# Altium PCB 多通道.PcbDoc (part 1 of 4)
Units mm, origin at the board's own origin, x right, y up, seen from the top; angles counter-clockwise.
Board outline 145 x 32 mm, 2 copper layers (Top Layer, Bottom Layer); 175 components, 157 nets, 554 pads, 195 vias.
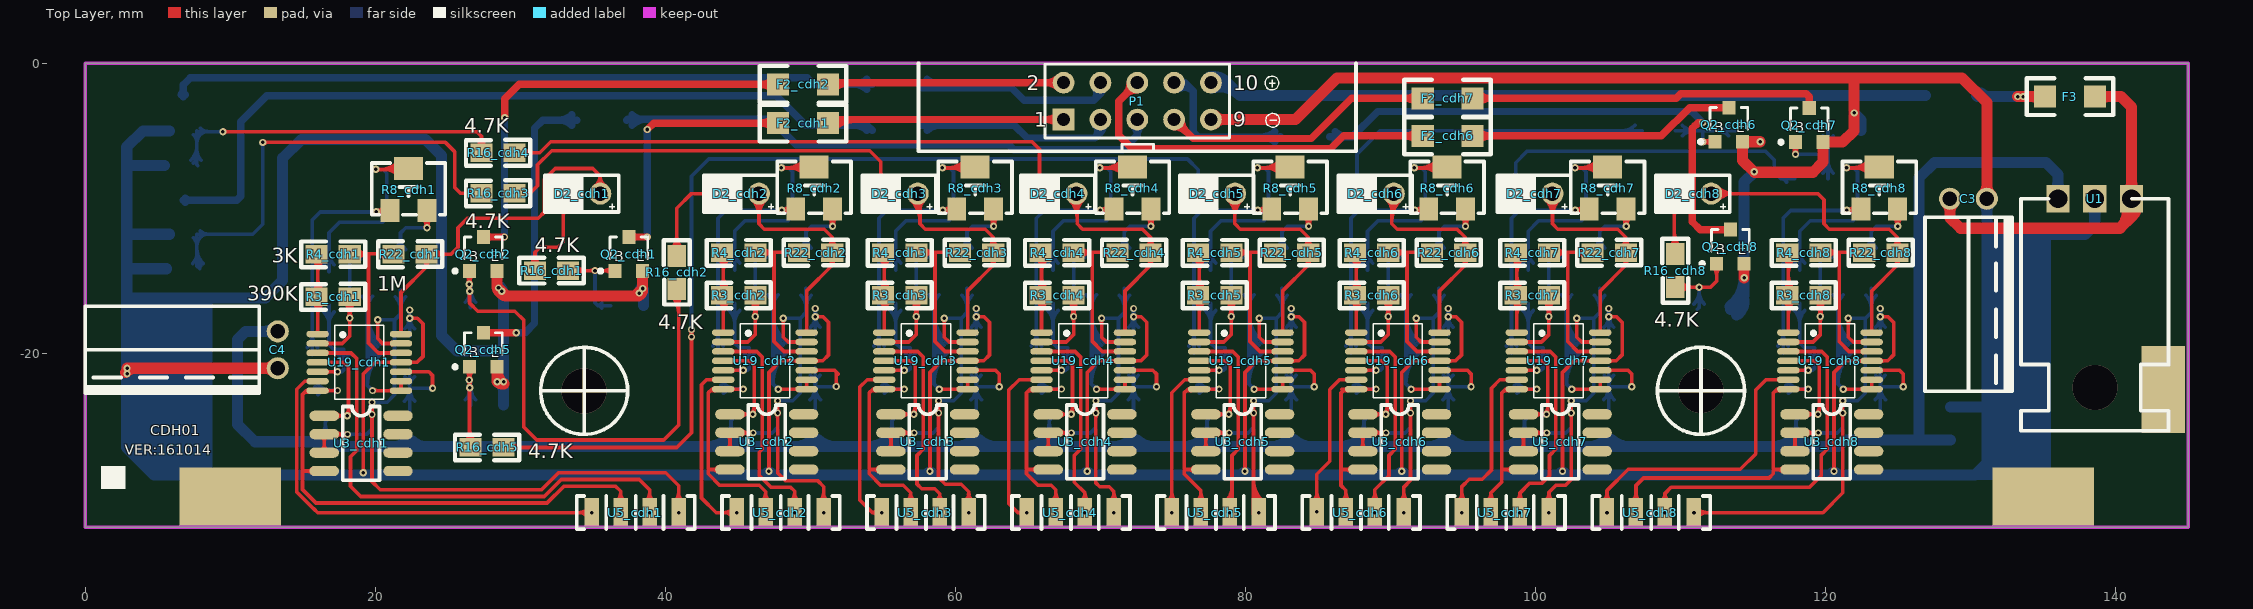
[diagram p0: Top Layer view]
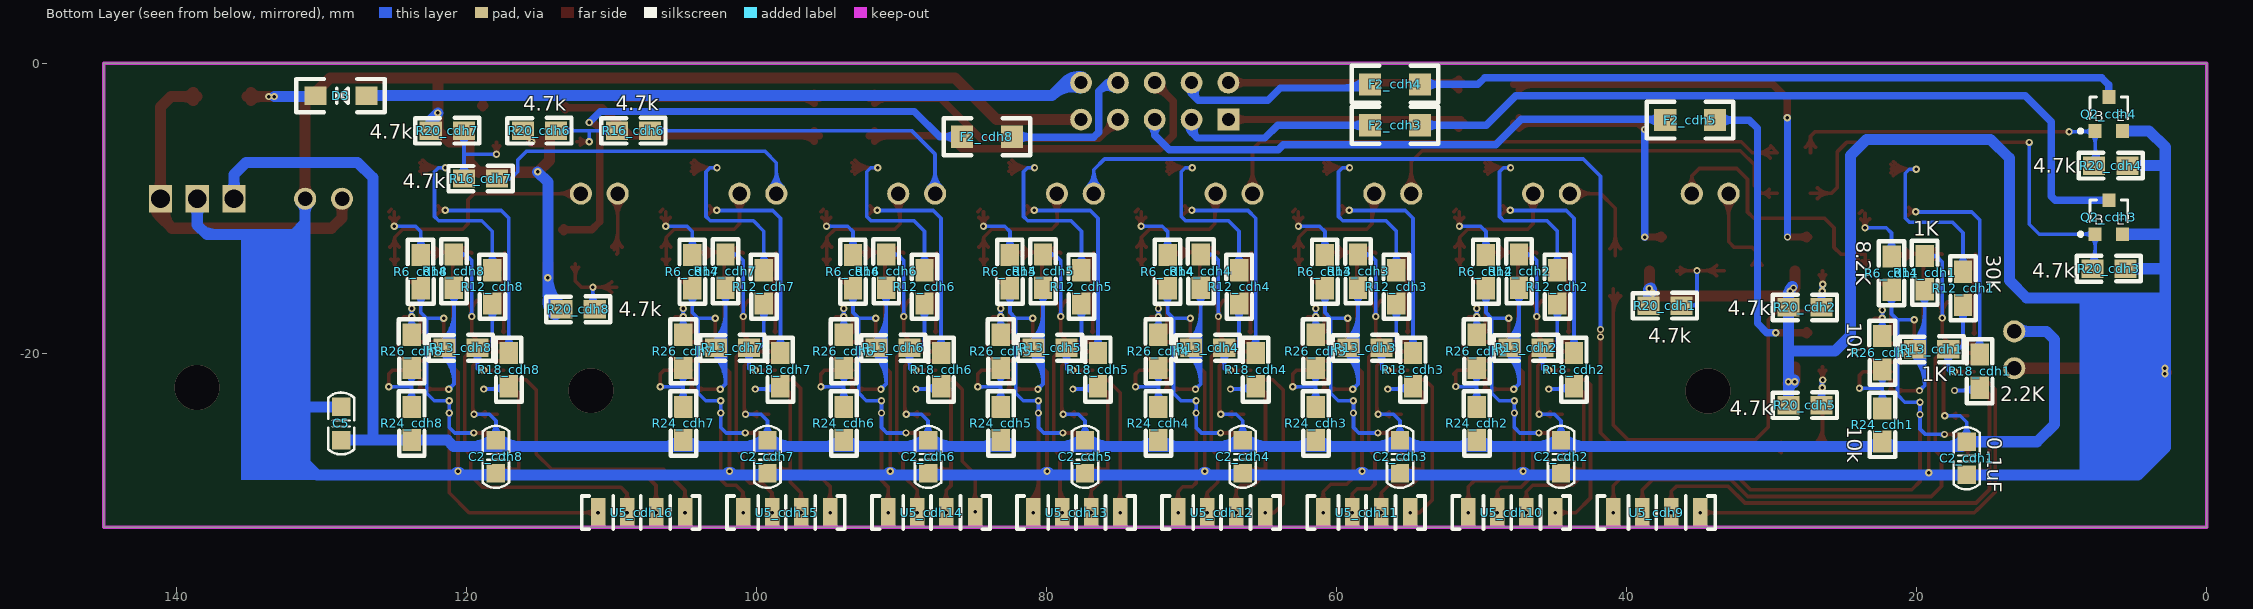
[diagram p1: Bottom Layer view, seen from below]

## Layer stack, top to bottom
Top Layer: signal copper 0.0356
Dielectric: dielectric 0.32, FR-4, Dk 4.8
Bottom Layer: signal copper 0.0356

## Board outline
0,-32 0,0 145,0 145,-32

## Design rules (kind name [scope] priority, off if disabled: settings)
Clearance [All] p1: gap=0.152
HoleSize [All] p1: absolutevalues=TRUE maxlimit=6 minlimit=0.025 maxpercent=80.000 minpercent=20.000
MinimumSolderMaskSliver [All] p1: minsoldermaskwidth=0
PolygonConnect [All] p1: connectstyle=Relief reliefconductorwidth=0.254 reliefentries=4 polygonreliefangle="90 Angle"
RoutingVias [All] p1: holewidth=0.711 width=1.27 viastyle="Through Hole" minholewidth=0.711 minwidth=1.27 maxholewidth=0.711 maxwidth=1.27
SilkToSilkClearance [All] p1: silktosilkclearance=-10
SilkscreenOverComponentPads [All] p1: minsilkscreentomaskgap=-10
SolderMaskExpansion [All] p1: expansion=0.102
Width [All] p1: maxlimit=1.27 minlimit=0.254 preferedwidth=0.254
24 further rules are at their usual default settings.

## Classes and differential pairs
component class 总图: C3 C4 C5 D3 F3 P1 U1
channel class cdh: cdh1 cdh2 cdh3 cdh4 cdh5 cdh6 cdh7 cdh8
net class CDH[1..8]: CDH1 CDH2 CDH3 CDH4 CDH5 CDH6 CDH7 CDH8
component class cdh1: C2_cdh1 D2_cdh1 F2_cdh1 Q2_cdh1 R3_cdh1 R4_cdh1 R6_cdh1 R8_cdh1 R12_cdh1 R13_cdh1 R14_cdh1 R16_cdh1 R18_cdh1 R20_cdh1 R22_cdh1 R24_cdh1 R26_cdh1 U3_cdh1 U5_cdh1 U19_cdh1
component class cdh4: C2_cdh4 D2_cdh4 F2_cdh4 Q2_cdh4 R3_cdh4 R4_cdh4 R6_cdh4 R8_cdh4 R12_cdh4 R13_cdh4 R14_cdh4 R16_cdh4 R18_cdh4 R20_cdh4 R22_cdh4 R24_cdh4 R26_cdh4 U3_cdh4 U5_cdh4 U19_cdh4
component class cdh7: C2_cdh7 D2_cdh7 F2_cdh7 Q2_cdh7 R3_cdh7 R4_cdh7 R6_cdh7 R8_cdh7 R12_cdh7 R13_cdh7 R14_cdh7 R16_cdh7 R18_cdh7 R20_cdh7 R22_cdh7 R24_cdh7 R26_cdh7 U3_cdh7 U5_cdh7 U19_cdh7
component class cdh8: C2_cdh8 D2_cdh8 F2_cdh8 Q2_cdh8 R3_cdh8 R4_cdh8 R6_cdh8 R8_cdh8 R12_cdh8 R13_cdh8 R14_cdh8 R16_cdh8 R18_cdh8 R20_cdh8 R22_cdh8 R24_cdh8 R26_cdh8 U3_cdh8 U5_cdh8 U19_cdh8
component class cdh2: C2_cdh2 D2_cdh2 F2_cdh2 Q2_cdh2 R3_cdh2 R4_cdh2 R6_cdh2 R8_cdh2 R12_cdh2 R13_cdh2 R14_cdh2 R16_cdh2 R18_cdh2 R20_cdh2 R22_cdh2 R24_cdh2 R26_cdh2 U3_cdh2 U5_cdh2 U19_cdh2
component class cdh3: C2_cdh3 D2_cdh3 F2_cdh3 Q2_cdh3 R3_cdh3 R4_cdh3 R6_cdh3 R8_cdh3 R12_cdh3 R13_cdh3 R14_cdh3 R16_cdh3 R18_cdh3 R20_cdh3 R22_cdh3 R24_cdh3 R26_cdh3 U3_cdh3 U5_cdh3 U19_cdh3
component class cdh5: C2_cdh5 D2_cdh5 F2_cdh5 Q2_cdh5 R3_cdh5 R4_cdh5 R6_cdh5 R8_cdh5 R12_cdh5 R13_cdh5 R14_cdh5 R16_cdh5 R18_cdh5 R20_cdh5 R22_cdh5 R24_cdh5 R26_cdh5 U3_cdh5 U5_cdh5 U19_cdh5
component class cdh6: C2_cdh6 D2_cdh6 F2_cdh6 Q2_cdh6 R3_cdh6 R4_cdh6 R6_cdh6 R8_cdh6 R12_cdh6 R13_cdh6 R14_cdh6 R16_cdh6 R18_cdh6 R20_cdh6 R22_cdh6 R24_cdh6 R26_cdh6 U3_cdh6 U5_cdh6 U19_cdh6

## Components (designator, comment, footprint, x,y, rotation, side; value= is the part's Value field where it differs from the comment)
C2_cdh1 "0.1uF" C0805 16.559,-27.244 r90 bottom (schematic designator C2)
C2_cdh2 "Cap Semi" C0805 44.524,-27.142 r90 bottom (schematic designator C2)
C2_cdh3 "Cap Semi" C0805 55.624,-27.142 r90 bottom (schematic designator C2)
C2_cdh4 "Cap Semi" C0805 66.47,-27.142 r90 bottom (schematic designator C2)
C2_cdh5 "Cap Semi" C0805 77.341,-27.142 r90 bottom (schematic designator C2)
C2_cdh6 "Cap Semi" C0805 88.161,-27.142 r90 bottom (schematic designator C2)
C2_cdh7 "Cap Semi" C0805 99.236,-27.142 r90 bottom (schematic designator C2)
C2_cdh8 "Cap Semi" C0805 117.955,-27.142 r90 bottom (schematic designator C2)
C3 "Cap Pol3" CAP-6*12 131.108,-9.347 r180 top
C4 "Cap Pol3" CAP-6*12 13.278,-21.031 r90 top
C5 "Cap Semi" C0805 128.619,-24.841 r270 bottom
D2_cdh1 "LED0" LED1 32.968,-8.992 r0 top (schematic designator D2)
D2_cdh2 "LED0" LED1 43.91,-8.992 r0 top (schematic designator D2)
D2_cdh3 "LED0" LED1 54.853,-8.992 r0 top (schematic designator D2)
D2_cdh4 "LED0" LED1 65.795,-8.992 r0 top (schematic designator D2)
D2_cdh5 "LED0" LED1 76.737,-8.992 r0 top (schematic designator D2)
D2_cdh6 "LED0" LED1 87.679,-8.992 r0 top (schematic designator D2)
D2_cdh7 "LED0" LED1 98.622,-8.992 r0 top (schematic designator D2)
D2_cdh8 "LED0" LED1 109.564,-8.992 r0 top (schematic designator D2)
D3 "1N4007" DIDOE 126.892,-2.235 r0 bottom
F2_cdh1 "Fuse 1" 1206 47.771,-4.115 r0 top (schematic designator F2)
F2_cdh2 "Fuse 1" 1206 47.771,-1.448 r0 top (schematic designator F2)
F2_cdh3 "Fuse 1" 1206 54.248,-4.293 r0 bottom (schematic designator F2)
F2_cdh4 "Fuse 1" 1206 54.248,-1.473 r0 bottom (schematic designator F2)
F2_cdh5 "Fuse 1" 1206 33.903,-3.937 r0 bottom (schematic designator F2)
F2_cdh6 "Fuse 1" 1206 95.65,-5.029 r180 top (schematic designator F2)
F2_cdh7 "Fuse 1" 1206 95.65,-2.438 r180 top (schematic designator F2)
F2_cdh8 "Fuse 1" 1206 85.82,-5.055 r180 bottom (schematic designator F2)
F3 "Fuse 1" 1206 135.122,-2.286 r0 top
P1 "Header 5X2" HDR2X5 67.456,-3.886 r0 top
Q2_cdh1 "NPN" SOT-23 37.484,-13.284 r0 top (schematic designator Q2)
Q2_cdh2 "NPN" SOT-23 27.451,-13.284 r0 top (schematic designator Q2)
Q2_cdh3 "NPN" SOT-23 6.75,-10.744 r180 bottom (schematic designator Q2)
Q2_cdh4 "NPN" SOT-23 6.75,-3.632 r180 bottom (schematic designator Q2)
Q2_cdh5 "NPN" SOT-23 27.451,-19.888 r0 top (schematic designator Q2)
Q2_cdh6 "NPN" SOT-23 113.328,-4.369 r0 top (schematic designator Q2)
Q2_cdh7 "NPN" SOT-23 118.866,-4.394 r0 top (schematic designator Q2)
Q2_cdh8 "NPN" SOT-23 113.43,-12.776 r0 top (schematic designator Q2)
R3_cdh1 "390K" 0805 18.238,-16.104 r180 top (schematic designator R3)
R3_cdh2 "Res2" 0805 46.203,-16.002 r180 top (schematic designator R3)
R3_cdh3 "Res2" 0805 57.303,-16.002 r180 top (schematic designator R3)
R3_cdh4 "Res2" 0805 68.149,-16.002 r180 top (schematic designator R3)
R3_cdh5 "Res2" 0805 79.02,-16.002 r180 top (schematic designator R3)
R3_cdh6 "Res2" 0805 89.84,-16.002 r180 top (schematic designator R3)
R3_cdh7 "Res2" 0805 100.915,-16.002 r180 top (schematic designator R3)
R3_cdh8 "Res2" 0805 119.635,-16.002 r180 top (schematic designator R3)
R4_cdh1 "3K" 0805 15.952,-13.183 r0 top (schematic designator R4)
R4_cdh2 "Res2" 0805 43.917,-13.081 r0 top (schematic designator R4)
R4_cdh3 "Res2" 0805 55.017,-13.081 r0 top (schematic designator R4)
R4_cdh4 "Res2" 0805 65.863,-13.081 r0 top (schematic designator R4)
R4_cdh5 "Res2" 0805 76.734,-13.081 r0 top (schematic designator R4)
R4_cdh6 "Res2" 0805 87.554,-13.081 r0 top (schematic designator R4)
R4_cdh7 "Res2" 0805 98.629,-13.081 r0 top (schematic designator R4)
R4_cdh8 "Res2" 0805 117.349,-13.081 r0 top (schematic designator R4)
R6_cdh1 "8.2K" 0805 21.736,-15.621 r90 bottom (schematic designator R6)
R6_cdh2 "Res2" 0805 49.701,-15.519 r90 bottom (schematic designator R6)
R6_cdh3 "Res2" 0805 60.801,-15.519 r90 bottom (schematic designator R6)
R6_cdh4 "Res2" 0805 71.647,-15.519 r90 bottom (schematic designator R6)
R6_cdh5 "Res2" 0805 82.518,-15.519 r90 bottom (schematic designator R6)
R6_cdh6 "Res2" 0805 93.339,-15.519 r90 bottom (schematic designator R6)
R6_cdh7 "Res2" 0805 104.413,-15.519 r90 bottom (schematic designator R6)
R6_cdh8 "Res2" 0805 123.133,-15.519 r90 bottom (schematic designator R6)
R8_cdh1 "Res Tap" 3224W 22.295,-7.264 r0 top (schematic designator R8)
R8_cdh2 "Res Tap" 3224W 50.26,-7.163 r0 top (schematic designator R8)
R8_cdh3 "Res Tap" 3224W 61.36,-7.163 r0 top (schematic designator R8)
R8_cdh4 "Res Tap" 3224W 72.206,-7.163 r0 top (schematic designator R8)
R8_cdh5 "Res Tap" 3224W 83.077,-7.163 r0 top (schematic designator R8)
R8_cdh6 "Res Tap" 3224W 93.897,-7.163 r0 top (schematic designator R8)
R8_cdh7 "Res Tap" 3224W 104.972,-7.163 r0 top (schematic designator R8)
R8_cdh8 "Res Tap" 3224W 123.692,-7.163 r0 top (schematic designator R8)
R12_cdh1 "30K" 0805 16.808,-14.376 r270 bottom (schematic designator R12)
R12_cdh2 "Res2" 0805 44.774,-14.275 r270 bottom (schematic designator R12)
R12_cdh3 "Res2" 0805 55.874,-14.275 r270 bottom (schematic designator R12)
R12_cdh4 "Res2" 0805 66.719,-14.275 r270 bottom (schematic designator R12)
R12_cdh5 "Res2" 0805 77.591,-14.275 r270 bottom (schematic designator R12)
R12_cdh6 "Res2" 0805 88.411,-14.275 r270 bottom (schematic designator R12)
R12_cdh7 "Res2" 0805 99.485,-14.275 r270 bottom (schematic designator R12)
R12_cdh8 "Res2" 0805 118.205,-14.275 r270 bottom (schematic designator R12)
R13_cdh1 "1K" 0805 17.829,-19.725 r0 bottom (schematic designator R13)
R13_cdh2 "Res2" 0805 45.794,-19.624 r0 bottom (schematic designator R13)
R13_cdh3 "Res2" 0805 56.894,-19.624 r0 bottom (schematic designator R13)
R13_cdh4 "Res2" 0805 67.74,-19.624 r0 bottom (schematic designator R13)
R13_cdh5 "Res2" 0805 78.611,-19.624 r0 bottom (schematic designator R13)
R13_cdh6 "Res2" 0805 89.431,-19.624 r0 bottom (schematic designator R13)
R13_cdh7 "Res2" 0805 100.506,-19.624 r0 bottom (schematic designator R13)
R13_cdh8 "Res2" 0805 119.225,-19.624 r0 bottom (schematic designator R13)
R14_cdh1 "1K" 0805 19.454,-13.299 r270 bottom (schematic designator R14)
R14_cdh2 "Res2" 0805 47.42,-13.198 r270 bottom (schematic designator R14)
R14_cdh3 "Res2" 0805 58.519,-13.198 r270 bottom (schematic designator R14)
R14_cdh4 "Res2" 0805 69.365,-13.198 r270 bottom (schematic designator R14)
R14_cdh5 "Res2" 0805 80.236,-13.198 r270 bottom (schematic designator R14)
R14_cdh6 "Res2" 0805 91.057,-13.198 r270 bottom (schematic designator R14)
R14_cdh7 "Res2" 0805 102.131,-13.198 r270 bottom (schematic designator R14)
R14_cdh8 "Res2" 0805 120.851,-13.198 r270 bottom (schematic designator R14)
R16_cdh1 "4.7K" 0805 31.007,-14.3 r0 top (schematic designator R16)
R16_cdh2 "4.7K" 0805 40.786,-13.284 r270 top (schematic designator R16)
R16_cdh3 "4.7K" 0805 29.61,-8.966 r180 top (schematic designator R16)
R16_cdh4 "4.7K" 0805 29.61,-6.172 r180 top (schematic designator R16)
R16_cdh5 "4.7K" 0805 28.848,-26.492 r180 top (schematic designator R16)
R16_cdh6 "4.7k" 0805 107.334,-4.648 r0 bottom (schematic designator R16)
R16_cdh7 "4.7k" 0805 117.875,-7.95 r0 bottom (schematic designator R16)
R16_cdh8 "4.7K" 0805 109.62,-13.157 r270 top (schematic designator R16)
R18_cdh1 "2.2K" 0805 15.665,-22.377 r90 bottom (schematic designator R18)
R18_cdh2 "Res2" 0805 43.631,-22.276 r90 bottom (schematic designator R18)
R18_cdh3 "Res2" 0805 54.731,-22.276 r90 bottom (schematic designator R18)
R18_cdh4 "Res2" 0805 65.576,-22.276 r90 bottom (schematic designator R18)
R18_cdh5 "Res2" 0805 76.448,-22.276 r90 bottom (schematic designator R18)
R18_cdh6 "Res2" 0805 87.268,-22.276 r90 bottom (schematic designator R18)
R18_cdh7 "Res2" 0805 98.342,-22.276 r90 bottom (schematic designator R18)
R18_cdh8 "Res2" 0805 117.062,-22.276 r90 bottom (schematic designator R18)
R20_cdh1 "4.7k" 0805 36.214,-16.713 r0 bottom (schematic designator R20)
R20_cdh2 "4.7k" 0805 26.562,-16.84 r0 bottom (schematic designator R20)
R20_cdh3 "4.7k" 0805 7.893,-14.173 r180 bottom (schematic designator R20)
R20_cdh4 "4.7k" 0805 7.766,-7.061 r180 bottom (schematic designator R20)
R20_cdh5 "4.7k" 0805 26.562,-23.571 r0 bottom (schematic designator R20)
R20_cdh6 "4.7k" 0805 113.811,-4.648 r0 bottom (schematic designator R20)
R20_cdh7 "4.7k" 0805 120.161,-4.648 r0 bottom (schematic designator R20)
R20_cdh8 "4.7k" 0805 111.144,-16.967 r0 bottom (schematic designator R20)
R22_cdh1 "1M" 0805 21.258,-13.172 r0 top (schematic designator R22)
R22_cdh2 "Res2" 0805 49.223,-13.071 r0 top (schematic designator R22)
R22_cdh3 "Res2" 0805 60.323,-13.071 r0 top (schematic designator R22)
R22_cdh4 "Res2" 0805 71.169,-13.071 r0 top (schematic designator R22)
R22_cdh5 "Res2" 0805 82.04,-13.071 r0 top (schematic designator R22)
R22_cdh6 "Res2" 0805 92.86,-13.071 r0 top (schematic designator R22)
R22_cdh7 "Res2" 0805 103.935,-13.071 r0 top (schematic designator R22)
R22_cdh8 "Res2" 0805 122.654,-13.071 r0 top (schematic designator R22)
R24_cdh1 "10k" 0805 22.371,-23.8 r270 bottom (schematic designator R24)
R24_cdh2 "Res2" 0805 50.336,-23.698 r270 bottom (schematic designator R24)
R24_cdh3 "Res2" 0805 61.436,-23.698 r270 bottom (schematic designator R24)
R24_cdh4 "Res2" 0805 72.282,-23.698 r270 bottom (schematic designator R24)
R24_cdh5 "Res2" 0805 83.153,-23.698 r270 bottom (schematic designator R24)
R24_cdh6 "Res2" 0805 93.974,-23.698 r270 bottom (schematic designator R24)
R24_cdh7 "Res2" 0805 105.048,-23.698 r270 bottom (schematic designator R24)
R24_cdh8 "Res2" 0805 123.768,-23.698 r270 bottom (schematic designator R24)
R26_cdh1 "10k" 0805 22.371,-18.821 r270 bottom (schematic designator R26)
R26_cdh2 "Res2" 0805 50.336,-18.72 r270 bottom (schematic designator R26)
R26_cdh3 "Res2" 0805 61.436,-18.72 r270 bottom (schematic designator R26)
R26_cdh4 "Res2" 0805 72.282,-18.72 r270 bottom (schematic designator R26)
R26_cdh5 "Res2" 0805 83.153,-18.72 r270 bottom (schematic designator R26)
R26_cdh6 "Res2" 0805 93.974,-18.72 r270 bottom (schematic designator R26)
R26_cdh7 "Res2" 0805 105.048,-18.72 r270 bottom (schematic designator R26)
R26_cdh8 "Res2" 0805 123.768,-18.72 r270 bottom (schematic designator R26)
U1 "L7808" TO-220 141.091,-9.347 r180 top
U3_cdh1 "LM317" SO-8 16.485,-24.308 r0 top (schematic designator U3)
U3_cdh2 "LM317" SO-8 44.451,-24.206 r0 top (schematic designator U3)
U3_cdh3 "LM317" SO-8 55.55,-24.206 r0 top (schematic designator U3)
U3_cdh4 "LM317" SO-8 66.396,-24.206 r0 top (schematic designator U3)
U3_cdh5 "LM317" SO-8 77.267,-24.206 r0 top (schematic designator U3)
U3_cdh6 "LM317" SO-8 88.088,-24.206 r0 top (schematic designator U3)
U3_cdh7 "LM317" SO-8 99.162,-24.206 r0 top (schematic designator U3)
U3_cdh8 "LM317" SO-8 117.882,-24.206 r0 top (schematic designator U3)
U5_cdh1 "Header 4" PIN4 34.917,-30.988 r0 top (schematic designator U5)
U5_cdh2 "Header 4" PIN4 44.917,-30.988 r0 top (schematic designator U5)
U5_cdh3 "Header 4" PIN4 54.917,-30.988 r0 top (schematic designator U5)
U5_cdh4 "Header 4" PIN4 64.917,-30.988 r0 top (schematic designator U5)
U5_cdh5 "Header 4" PIN4 74.917,-30.988 r0 top (schematic designator U5)
U5_cdh6 "Header 4" PIN4 84.917,-30.988 r0 top (schematic designator U5)
U5_cdh7 "Header 4" PIN4 94.917,-30.988 r0 top (schematic designator U5)
U5_cdh8 "Header 4" PIN4 104.917,-30.988 r0 top (schematic designator U5)
U5_cdh9 "Header 4" PIN4 34.917,-30.988 r0 bottom (schematic designator U5)
U5_cdh10 "Header 4" PIN4 44.917,-30.988 r0 bottom (schematic designator U5)
U5_cdh11 "Header 4" PIN4 54.917,-30.988 r0 bottom (schematic designator U5)
U5_cdh12 "Header 4" PIN4 64.917,-30.988 r0 bottom (schematic designator U5)
U5_cdh13 "Header 4" PIN4 74.917,-30.988 r0 bottom (schematic designator U5)
U5_cdh14 "Header 4" PIN4 84.912,-30.988 r0 bottom (schematic designator U5)
U5_cdh15 "Header 4" PIN4 94.917,-30.988 r0 bottom (schematic designator U5)
U5_cdh16 "Header 4" PIN4 104.917,-30.988 r0 bottom (schematic designator U5)
U19_cdh1 "TLC2264" TSSOP14 18.898,-20.625 r0 top (schematic designator U19)
U19_cdh2 "TLC2264" TSSOP14 46.864,-20.523 r0 top (schematic designator U19)
U19_cdh3 "TLC2264" TSSOP14 57.963,-20.523 r0 top (schematic designator U19)
U19_cdh4 "TLC2264" TSSOP14 68.809,-20.523 r0 top (schematic designator U19)
U19_cdh5 "TLC2264" TSSOP14 79.68,-20.523 r0 top (schematic designator U19)
U19_cdh6 "TLC2264" TSSOP14 90.501,-20.523 r0 top (schematic designator U19)
U19_cdh7 "TLC2264" TSSOP14 101.575,-20.523 r0 top (schematic designator U19)
U19_cdh8 "TLC2264" TSSOP14 120.295,-20.523 r0 top (schematic designator U19)

## Footprints (in the part's own frame and the unit in brackets; to place one, negate y for a bottom-side part, rotate by r counter-clockwise, add the part's x,y. Pads: shape width x height; smd on the part's side, far side on the other; paste and mask are expansions set on the pad)
0805 [mil]
  rect 60x50 smd: 1(0,0) 2(90,0)
  silkscreen extent -42,-35 132,35
1206 [mil]
  rect 60x60 smd: 1(0.22,-0.6) 2(135.22,-0.6)
  silkscreen extent -50,-51 185,49
3224W [mm] "SOT23, 3-Leads, Body 3.0x2.6mm (max), Pitch 0.95mm, IPC Medium Den"
  rect 1.3x1.6 smd: 1(1.27,-2.9) 2(-1.27,-2.9)
  rect 2x1.6 smd: 3(0,0)
  silkscreen extent -2.54,-3.17 2.54,0.38
C0805 [mil]
  rect 50x50 smd: 1(-45,0) 2(45,0)
  silkscreen extent -84,-36 84,36, body extent -39,-25 40,24, height 20
CAP-6*12 [mil]
  round 60 hole 39.37: 1(100,0) 2(0,0)
  silkscreen extent -68,50 168,522
DIDOE [mil]
  rect 60x50 smd: 1(0,0) 2(137.8,0)
  silkscreen extent -50,-45 190,45
HDR2X5 [mm] "Connector; Header; 5x2 Posi"
  rect 1.5x1.5 hole 0.9: 1(0,0)
  round 1.5 hole 0.9: 2(0,2.54) 3(2.54,0) 4(2.54,2.54) 5(5.08,0) 6(5.08,2.54) 7(7.62,0) 8(7.62,2.54) 9(10.16,0) 10(10.16,2.54)
  silkscreen extent -1.27,-1.27 11.43,3.81
LED1 [mil]
  round 60 hole 39.37: 1(100,0) 2(0,0)
  silkscreen extent -50,-50 150,50
PIN4 [mm]
  rect 1x2 smd: 1(0,0) 2(2,0) 3(4,0) 4(6,0)
  silkscreen extent -1.02,-1.14 7.11,1.14
SO-8 [mil]
  oval 80x28 smd: 1(0,0) 2(0,-50) 3(0,-100) 4(0,-150) 5(200,-150) 6(200,-100) 7(200,-50) 8(200,0)
  silkscreen extent 50,-175 150,25
SOT-23 [mm]
  rect 0.9x0.95 smd: 1(0,1.302) 2(-0.95,-1.048) 3(0.95,-1.048)
  silkscreen extent -2.07,-1.17 1.3,1.3
TO-220 [mm]
  rect 1.6x1.9 hole 1.3: 1(0,0) 2(2.54,0) 3(5.08,0)
  silkscreen extent -2.54,0 7.62,16
TSSOP14 [mm]
  oval 1.55x0.45 smd: 1(-2.875,1.95) 2(-2.875,1.3) 3(-2.875,0.65) 4(-2.875,0) 5(-2.875,-0.65) 6(-2.875,-1.3) 7(-2.875,-1.95) 8(2.875,-1.95) 9(2.875,-1.3) 10(2.875,-0.65) 11(2.875,0) 12(2.875,0.65) 13(2.875,1.3) 14(2.875,1.95)
  silkscreen extent -1.7,-2.55 1.7,2.55, body extent -2.25,-2.55 2.25,2.55, height 2.65

## Part data
C2_cdh1: library part "Cap Semi", "Capacitor (Semiconductor SIM Mo"
C2_cdh2 C2_cdh3 C2_cdh4 C2_cdh5 C2_cdh6 C2_cdh7 C2_cdh8 C5: "Capacitor (Semiconductor SIM Mo"
C3 C4: "Polarized Capacitor (Surface Mo"
D2_cdh1 D2_cdh2 D2_cdh3 D2_cdh4 D2_cdh5 D2_cdh6 D2_cdh7 D2_cdh8: "Typical INFRARED GaA"
D3: library part "Diode 1N4007", "1 Amp General Purpose Recti"
P1: "Header, 5-Pin, Dual row"
Q2_cdh1 Q2_cdh2 Q2_cdh3 Q2_cdh4 Q2_cdh5 Q2_cdh6 Q2_cdh7 Q2_cdh8: "NPN Bipolar Transi"
R3_cdh1 R4_cdh1 R6_cdh1 R12_cdh1 R13_cdh1 R14_cdh1 R16_cdh1 R16_cdh2 R16_cdh3 R16_cdh4 R16_cdh5 R16_cdh6 R16_cdh7 R16_cdh8 R18_cdh1 R20_cdh1 R20_cdh2 R20_cdh3 R20_cdh4 R20_cdh5 R20_cdh6 R20_cdh7 R20_cdh8 R22_cdh1 R24_cdh1 R26_cdh1: library part Res2, "Resi"
R3_cdh2 R3_cdh3 R3_cdh4 R3_cdh5 R3_cdh6 R3_cdh7 R3_cdh8 R4_cdh2 R4_cdh3 R4_cdh4 R4_cdh5 R4_cdh6 R4_cdh7 R4_cdh8 R6_cdh2 R6_cdh3 R6_cdh4 R6_cdh5 R6_cdh6 R6_cdh7 R6_cdh8 R12_cdh2 R12_cdh3 R12_cdh4 R12_cdh5 R12_cdh6 R12_cdh7 R12_cdh8 R13_cdh2 R13_cdh3 R13_cdh4 R13_cdh5 R13_cdh6 R13_cdh7 R13_cdh8 R14_cdh2 R14_cdh3 R14_cdh4 R14_cdh5 R14_cdh6 R14_cdh7 R14_cdh8 R18_cdh2 R18_cdh3 R18_cdh4 R18_cdh5 R18_cdh6 R18_cdh7 R18_cdh8 R22_cdh2 R22_cdh3 R22_cdh4 R22_cdh5 R22_cdh6 R22_cdh7 R22_cdh8 R24_cdh2 R24_cdh3 R24_cdh4 R24_cdh5 R24_cdh6 R24_cdh7 R24_cdh8 R26_cdh2 R26_cdh3 R26_cdh4 R26_cdh5 R26_cdh6 R26_cdh7 R26_cdh8: "Resi"
R8_cdh1 R8_cdh2 R8_cdh3 R8_cdh4 R8_cdh5 R8_cdh6 R8_cdh7 R8_cdh8: "Tapped Resistor"
U5_cdh1 U5_cdh2 U5_cdh3 U5_cdh4 U5_cdh5 U5_cdh6 U5_cdh7 U5_cdh8 U5_cdh9 U5_cdh10 U5_cdh11 U5_cdh12 U5_cdh13 U5_cdh14 U5_cdh15 U5_cdh16: "Header, 4"
U19_cdh1 U19_cdh2 U19_cdh3 U19_cdh4 U19_cdh5 U19_cdh6 U19_cdh7 U19_cdh8: library part TLC

## Free pads (board coordinates)
  rect 7x4 smd: 0(10,-29.87) 0(135,-29.87)
  rect 3x6 smd: 1(143.275,-22.504)

## Via types
v1: diameter 0.5, hole 0.25, Top Layer to Bottom Layer, 192 vias
v2: diameter 3.1, hole 3.1, Top Layer to Bottom Layer, 3 vias

## Nets (pads, with @x,y where several pads share a name; then routed paths per layer and width w, separated by ;. In a path a pad name is that pad's centre, name@x,y a point inside that pad or via, vN(x,y) a via of type N, cw(c..) or ccw(c..) an arc to the next point about the centre after c; other vN are vias at no path point)
CDH1: 
CDH2: 
CDH3: 
CDH4: 
CDH5: 
CDH6: 
CDH7: 
CDH8: 
GND: C2_cdh1.1 C2_cdh2.1 C2_cdh3.1 C2_cdh4.1 C2_cdh5.1 C2_cdh6.1 C2_cdh7.1 C2_cdh8.1 C3.2 C4.2 C5.1 P1.9 Q2_cdh1.3 Q2_cdh2.3 Q2_cdh3.3 Q2_cdh4.3 Q2_cdh5.3 Q2_cdh6.3 Q2_cdh7.3 Q2_cdh8.3 R20_cdh1.2 R20_cdh2.2 R20_cdh3.2 R20_cdh4.2 R20_cdh5.2 R20_cdh6.2 R20_cdh7.2 R20_cdh8.2 R26_cdh1.1 R26_cdh2.1 R26_cdh3.1 R26_cdh4.1 R26_cdh5.1 R26_cdh6.1 R26_cdh7.1 R26_cdh8.1 U1.2 U19_cdh1.11 U19_cdh2.11 U19_cdh3.11 U19_cdh4.11 U19_cdh5.11 U19_cdh6.11 U19_cdh7.11 U19_cdh8.11 | length 583.4
  Top Layer w0.254: v1@19.088,-28.147 ccw(c18.878,-27.937) 19.175,-27.937 ccw(c19.472,-27.937) v1@19.262,-28.147 ; v1(19.175,-28.234) 19.175,-21.427 19.977,-20.625 U19_cdh1.11@21.773,-20.625 22.879,-20.625 23.285,-20.218 23.285,-17.958 22.904,-17.577 v1(22.371,-17.577) ; U19_cdh1.11@21.154,-20.694 ccw(c20.987,-20.861) 20.987,-20.625 ccw(c20.987,-20.388) U19_cdh1.11@21.154,-20.556 ; U19_cdh1.11@22.392,-20.694 cw(c22.56,-20.861) 22.56,-20.625 cw(c22.56,-20.388) U19_cdh1.11@22.392,-20.556 ; v1@22.458,-17.664 cw(c22.668,-17.874) 22.668,-17.577 cw(c22.668,-17.28) v1@22.458,-17.49 ; v1@47.053,-28.046 ccw(c46.843,-27.836) 47.14,-27.836 ccw(c47.437,-27.836) v1@47.227,-28.046 ; v1(47.14,-28.133) 47.14,-21.326 47.943,-20.523 U19_cdh2.11@49.739,-20.523 50.844,-20.523 51.251,-20.117 51.251,-17.856 50.87,-17.475 v1(50.336,-17.475) ; U19_cdh2.11@49.119,-20.592 ccw(c48.952,-20.76) 48.952,-20.523 ccw(c48.952,-20.287) U19_cdh2.11@49.119,-20.454 ; U19_cdh2.11@50.358,-20.592 cw(c50.525,-20.76) 50.525,-20.523 cw(c50.525,-20.287) U19_cdh2.11@50.358,-20.454 ; v1@50.423,-17.562 cw(c50.633,-17.772) 50.633,-17.475 cw(c50.633,-17.178) v1@50.423,-17.388 ; v1@58.153,-28.046 ccw(c57.943,-27.836) 58.24,-27.836 ccw(c58.537,-27.836) v1@58.327,-28.046 ; v1(58.24,-28.133) 58.24,-21.326 59.042,-20.523 U19_cdh3.11@60.838,-20.523 61.944,-20.523 62.351,-20.117 62.351,-17.856 61.97,-17.475 v1(61.436,-17.475) ; U19_cdh3.11@60.219,-20.592 ccw(c60.052,-20.76) 60.052,-20.523 ccw(c60.052,-20.287) U19_cdh3.11@60.219,-20.454 ; U19_cdh3.11@61.458,-20.592 cw(c61.625,-20.76) 61.625,-20.523 cw(c61.625,-20.287) U19_cdh3.11@61.458,-20.454 ; v1@61.523,-17.562 cw(c61.733,-17.772) 61.733,-17.475 cw(c61.733,-17.178) v1@61.523,-17.388 ; v1@68.999,-28.046 ccw(c68.789,-27.836) 69.086,-27.836 ccw(c69.383,-27.836) v1@69.173,-28.046 ; v1(69.086,-28.133) 69.086,-21.326 69.888,-20.523 U19_cdh4.11@71.684,-20.523 72.79,-20.523 73.196,-20.117 73.196,-17.856 72.815,-17.475 v1(72.282,-17.475) ; U19_cdh4.11@71.065,-20.592 ccw(c70.898,-20.76) 70.898,-20.523 ccw(c70.898,-20.287) U19_cdh4.11@71.065,-20.454 ; U19_cdh4.11@72.303,-20.592 cw(c72.471,-20.76) 72.471,-20.523 cw(c72.471,-20.287) U19_cdh4.11@72.303,-20.454 ; v1@72.369,-17.562 cw(c72.579,-17.772) 72.579,-17.475 cw(c72.579,-17.178) v1@72.369,-17.388 ; v1@79.87,-28.046 ccw(c79.66,-27.836) 79.957,-27.836 ccw(c80.254,-27.836) v1@80.044,-28.046 ; v1(79.957,-28.133) 79.957,-21.326 80.759,-20.523 U19_cdh5.11@82.555,-20.523 83.661,-20.523 84.068,-20.117 84.068,-17.856 83.687,-17.475 v1(83.153,-17.475) ; U19_cdh5.11@81.936,-20.592 ccw(c81.769,-20.76) 81.769,-20.523 ccw(c81.769,-20.287) U19_cdh5.11@81.936,-20.454 ; U19_cdh5.11@83.175,-20.592 cw(c83.342,-20.76) 83.342,-20.523 cw(c83.342,-20.287) U19_cdh5.11@83.175,-20.454 ; v1@83.24,-17.562 cw(c83.45,-17.772) 83.45,-17.475 cw(c83.45,-17.178) v1@83.24,-17.388 ; v1@90.69,-28.046 ccw(c90.48,-27.836) 90.777,-27.836 ccw(c91.074,-27.836) v1@90.864,-28.046 ; v1(90.777,-28.133) 90.777,-21.326 91.58,-20.523 U19_cdh6.11@93.376,-20.523 94.482,-20.523 94.888,-20.117 94.888,-17.856 94.507,-17.475 v1(93.974,-17.475) ; U19_cdh6.11@92.757,-20.592 ccw(c92.589,-20.76) 92.589,-20.523 ccw(c92.589,-20.287) U19_cdh6.11@92.757,-20.454 ; U19_cdh6.11@93.995,-20.592 cw(c94.162,-20.76) 94.162,-20.523 cw(c94.162,-20.287) U19_cdh6.11@93.995,-20.454 ; v1@94.061,-17.562 cw(c94.271,-17.772) 94.271,-17.475 cw(c94.271,-17.178) v1@94.061,-17.388 ; v1@101.765,-28.046 ccw(c101.555,-27.836) 101.852,-27.836 ccw(c102.149,-27.836) v1@101.939,-28.046 ; v1(101.852,-28.133) 101.852,-21.326 102.654,-20.523 U19_cdh7.11@104.45,-20.523 105.556,-20.523 105.962,-20.117 105.962,-17.856 105.581,-17.475 v1(105.048,-17.475) ; U19_cdh7.11@103.831,-20.592 ccw(c103.664,-20.76) 103.664,-20.523 ccw(c103.664,-20.287) U19_cdh7.11@103.831,-20.454 ; U19_cdh7.11@105.069,-20.592 cw(c105.237,-20.76) 105.237,-20.523 cw(c105.237,-20.287) U19_cdh7.11@105.069,-20.454 ; v1@105.135,-17.562 cw(c105.345,-17.772) 105.345,-17.475 cw(c105.345,-17.178) v1@105.135,-17.388 ; v1@120.485,-28.046 ccw(c120.275,-27.836) 120.572,-27.836 ccw(c120.869,-27.836) v1@120.659,-28.046 ; v1(120.572,-28.133) 120.572,-21.326 121.374,-20.523 U19_cdh8.11@123.17,-20.523 124.276,-20.523 124.682,-20.117 124.682,-17.856 124.301,-17.475 v1(123.768,-17.475) ; U19_cdh8.11@122.551,-20.592 ccw(c122.383,-20.76) 122.383,-20.523 ccw(c122.383,-20.287) U19_cdh8.11@122.551,-20.454 ; U19_cdh8.11@123.789,-20.592 cw(c123.957,-20.76) 123.957,-20.523 cw(c123.957,-20.287) U19_cdh8.11@123.789,-20.454 ; v1@123.855,-17.562 cw(c124.065,-17.772) 124.065,-17.475 cw(c124.065,-17.178) v1@123.855,-17.388
  Top Layer w0.762: v1@2.797,-21.32 cw(c3.493,-22.016) 3.493,-21.031 ; v1(2.889,-21.031) C4.2@13.278,-21.031 ; C4.2@13.008,-21.301 ccw(c12.358,-21.951) 12.358,-21.031 ccw(c12.358,-20.111) C4.2@13.008,-20.762 ; Q2_cdh5.3@28.401,-21.208 ccw(c29.611,-21.208) v1@28.755,-22.064 ; Q2_cdh5.3@28.401,-20.936 v1(28.401,-21.956) ; 28.401,-15.259 ccw(c29.195,-15.259) 28.633,-15.82 ccw(c29.195,-15.259) 29.195,-16.053 ; Q2_cdh2.3@28.401,-14.332 v1@28.401,-15.403 ; v1@28.417,-21.826 cw(c28.367,-22.234) v1@28.691,-21.981 ; v1@28.515,-22.02 ccw(c28.199,-21.841) 28.549,-21.744 ; v1@28.611,-15.79 ccw(c29.051,-15.553) 29.051,-16.053 ; v1@28.664,-15.843 cw(c28.901,-15.403) v1@28.401,-15.403 ; v1@28.873,-22.1 cw(c28.772,-21.585) v1(28.401,-21.956) ; v1@28.881,-22.098 cw(c28.76,-21.628) 28.416,-21.971 v1(28.401,-21.956) ; Q2_cdh1.3@38.434,-14.332 v1(38.434,-15.535) 37.916,-16.053 29.051,-16.053 ; P1.9@77.616,-3.886 83.433,-3.886 86.303,-1.016 121.939,-1.016 ; P1.9@77.877,-4.147 cw(c78.507,-4.777) 78.507,-3.886 cw(c78.507,-2.995) P1.9@77.877,-3.625 ; v1(114.38,-14.798) Q2_cdh8.3@114.38,-13.824 ; v1(115.481,-5.417) Q2_cdh6.3@114.278,-5.417 114.278,-6.716 115.081,-7.518 119.12,-7.518 119.816,-6.822 Q2_cdh7.3@119.816,-5.442 121.17,-5.442 121.939,-4.674 121.939,-1.016 ; C3.2@130.839,-9.078 ccw(c130.189,-8.427) 131.108,-8.427 ccw(c132.028,-8.427) C3.2@131.378,-9.078 ; C3.2@131.108,-9.347 131.108,-2.718 129.407,-1.016 121.939,-1.016 ; v1@28.401,-15.403 v1(28.492,-15.494) v1(28.726,-15.728) 29.051,-16.053 ; v1@38.288,-15.942 cw(c38.021,-15.675) 38.021,-16.053 ccw(c38.021,-15.675) v1@38.288,-15.942 ; v1@38.288,-15.942 ccw(c37.935,-15.589) 38.434,-15.589 cw(c37.935,-15.589) v1@38.288,-15.942
  Bottom Layer w0.254: R26_cdh1.1@22.037,-18.312 ccw(c21.396,-17.577) v1(22.371,-17.577) ; v1@22.264,-17.638 cw(c22.007,-17.787) 22.294,-17.864 cw(c22.581,-17.94) v1@22.432,-17.683 ; v1@22.284,-17.664 cw(c22.074,-17.874) 22.371,-17.874 cw(c22.668,-17.874) v1@22.458,-17.664 ; v1@22.284,-17.49 ccw(c22.074,-17.28) 22.371,-17.28 ccw(c22.668,-17.28) v1@22.458,-17.49 ; v1@22.284,-17.105 cw(c22.074,-17.315) 22.371,-17.315 cw(c22.668,-17.315) v1@22.458,-17.105 ; v1@22.31,-17.683 cw(c22.161,-17.94) 22.448,-17.864 cw(c22.735,-17.787) v1@22.478,-17.638 ; R26_cdh1.1@22.371,-18.821 v1(22.371,-17.577) ; v1(22.371,-17.018) v1(22.371,-17.577) ; R26_cdh1.1@22.705,-18.312 cw(c23.346,-17.577) v1(22.371,-17.577) ; R26_cdh2.1@50.002,-18.21 ccw(c49.361,-17.475) v1(50.336,-17.475) ; v1@50.23,-17.537 cw(c49.973,-17.685) 50.26,-17.762 cw(c50.546,-17.839) v1@50.398,-17.582 ; v1@50.249,-17.562 cw(c50.039,-17.772) 50.336,-17.772 cw(c50.633,-17.772) v1@50.423,-17.562 ; v1@50.249,-17.388 ccw(c50.039,-17.178) 50.336,-17.178 ccw(c50.633,-17.178) v1@50.423,-17.388 ; v1@50.249,-17.003 cw(c50.039,-17.213) 50.336,-17.213 cw(c50.633,-17.213) v1@50.423,-17.003 ; v1@50.275,-17.582 cw(c50.126,-17.839) 50.413,-17.762 cw(c50.7,-17.685) v1@50.443,-17.537 ; R26_cdh2.1@50.336,-18.72 v1(50.336,-17.475) ; v1(50.336,-16.916) v1(50.336,-17.475) ; R26_cdh2.1@50.67,-18.21 cw(c51.312,-17.475) v1(50.336,-17.475) ; R26_cdh3.1@61.102,-18.21 ccw(c60.461,-17.475) v1(61.436,-17.475) ; v1@61.33,-17.537 cw(c61.072,-17.685) 61.359,-17.762 cw(c61.646,-17.839) v1@61.498,-17.582 ; v1@61.349,-17.562 cw(c61.139,-17.772) 61.436,-17.772 cw(c61.733,-17.772) v1@61.523,-17.562 ; v1@61.349,-17.388 ccw(c61.139,-17.178) 61.436,-17.178 ccw(c61.733,-17.178) v1@61.523,-17.388 ; v1@61.349,-17.003 cw(c61.139,-17.213) 61.436,-17.213 cw(c61.733,-17.213) v1@61.523,-17.003 ; v1@61.375,-17.582 cw(c61.226,-17.839) 61.513,-17.762 cw(c61.8,-17.685) v1@61.543,-17.537 ; R26_cdh3.1@61.436,-18.72 v1(61.436,-17.475) ; v1(61.436,-16.916) v1(61.436,-17.475) ; R26_cdh3.1@61.77,-18.21 cw(c62.411,-17.475) v1(61.436,-17.475) ; R26_cdh4.1@71.948,-18.21 ccw(c71.307,-17.475) v1(72.282,-17.475) ; v1@72.175,-17.537 cw(c71.918,-17.685) 72.205,-17.762 cw(c72.492,-17.839) v1@72.343,-17.582 ; v1@72.195,-17.562 cw(c71.985,-17.772) 72.282,-17.772 cw(c72.579,-17.772) v1@72.369,-17.562 ; v1@72.195,-17.388 ccw(c71.985,-17.178) 72.282,-17.178 ccw(c72.579,-17.178) v1@72.369,-17.388 ; v1@72.195,-17.003 cw(c71.985,-17.213) 72.282,-17.213 cw(c72.579,-17.213) v1@72.369,-17.003 ; v1@72.221,-17.582 cw(c72.072,-17.839) 72.359,-17.762 cw(c72.646,-17.685) v1@72.389,-17.537 ; R26_cdh4.1@72.282,-18.72 v1(72.282,-17.475) ; v1(72.282,-16.916) v1(72.282,-17.475) ; R26_cdh4.1@72.616,-18.21 cw(c73.257,-17.475) v1(72.282,-17.475) ; R26_cdh5.1@82.819,-18.21 ccw(c82.178,-17.475) v1(83.153,-17.475) ; v1@83.047,-17.537 cw(c82.789,-17.685) 83.076,-17.762 cw(c83.363,-17.839) v1@83.215,-17.582 ; v1@83.066,-17.562 cw(c82.856,-17.772) 83.153,-17.772 cw(c83.45,-17.772) v1@83.24,-17.562 ; v1@83.066,-17.388 ccw(c82.856,-17.178) 83.153,-17.178 ccw(c83.45,-17.178) v1@83.24,-17.388 ; v1@83.066,-17.003 cw(c82.856,-17.213) 83.153,-17.213 cw(c83.45,-17.213) v1@83.24,-17.003 ; v1@83.092,-17.582 cw(c82.943,-17.839) 83.23,-17.762 cw(c83.517,-17.685) v1@83.26,-17.537 ; R26_cdh5.1@83.153,-18.72 v1(83.153,-17.475) ; v1(83.153,-16.916) v1(83.153,-17.475) ; R26_cdh5.1@83.487,-18.21 cw(c84.128,-17.475) v1(83.153,-17.475) ; R26_cdh6.1@93.64,-18.21 ccw(c92.998,-17.475) v1(93.974,-17.475) ; v1@93.867,-17.537 cw(c93.61,-17.685) 93.897,-17.762 cw(c94.184,-17.839) v1@94.035,-17.582 ; v1@93.887,-17.562 cw(c93.677,-17.772) 93.974,-17.772 cw(c94.271,-17.772) v1@94.061,-17.562 ; v1@93.887,-17.388 ccw(c93.677,-17.178) 93.974,-17.178 ccw(c94.271,-17.178) v1@94.061,-17.388 ; v1@93.887,-17.003 cw(c93.677,-17.213) 93.974,-17.213 cw(c94.271,-17.213) v1@94.061,-17.003 ; v1@93.912,-17.582 cw(c93.764,-17.839) 94.05,-17.762 cw(c94.337,-17.685) v1@94.08,-17.537 ; R26_cdh6.1@93.974,-18.72 v1(93.974,-17.475) ; v1(93.974,-16.916) v1(93.974,-17.475) ; R26_cdh6.1@94.308,-18.21 cw(c94.949,-17.475) v1(93.974,-17.475) ; R26_cdh7.1@104.714,-18.21 ccw(c104.073,-17.475) v1(105.048,-17.475) ; v1@104.941,-17.537 cw(c104.684,-17.685) 104.971,-17.762 cw(c105.258,-17.839) v1@105.109,-17.582 ; v1@104.961,-17.562 cw(c104.751,-17.772) 105.048,-17.772 cw(c105.345,-17.772) v1@105.135,-17.562 ; v1@104.961,-17.388 ccw(c104.751,-17.178) 105.048,-17.178 ccw(c105.345,-17.178) v1@105.135,-17.388 ; v1@104.961,-17.003 cw(c104.751,-17.213) 105.048,-17.213 cw(c105.345,-17.213) v1@105.135,-17.003 ; v1@104.987,-17.582 cw(c104.838,-17.839) 105.125,-17.762 cw(c105.412,-17.685) v1@105.155,-17.537 ; R26_cdh7.1@105.048,-18.72 v1(105.048,-17.475) ; v1(105.048,-16.916) v1(105.048,-17.475) ; R26_cdh7.1@105.382,-18.21 cw(c106.023,-17.475) v1(105.048,-17.475) ; R26_cdh8.1@123.434,-18.21 ccw(c122.793,-17.475) v1(123.768,-17.475) ; v1@123.661,-17.537 cw(c123.404,-17.685) 123.691,-17.762 cw(c123.978,-17.839) v1@123.829,-17.582 ; v1@123.681,-17.562 cw(c123.471,-17.772) 123.768,-17.772 cw(c124.065,-17.772) v1@123.855,-17.562 ; v1@123.681,-17.388 ccw(c123.471,-17.178) 123.768,-17.178 ccw(c124.065,-17.178) v1@123.855,-17.388 ; v1@123.681,-17.003 cw(c123.471,-17.213) 123.768,-17.213 cw(c124.065,-17.213) v1@123.855,-17.003 ; v1@123.706,-17.582 cw(c123.558,-17.839) 123.845,-17.762 cw(c124.132,-17.685) v1@123.874,-17.537 ; R26_cdh8.1@123.768,-18.72 v1(123.768,-17.475) ; v1(123.768,-16.916) v1(123.768,-17.475) ; R26_cdh8.1@124.102,-18.21 cw(c124.743,-17.475) v1(123.768,-17.475)
  Bottom Layer w0.762: 2.991,-7.061 R20_cdh4.2@5.48,-7.061 ; 3.15,-11.792 Q2_cdh3.3@5.8,-11.792 ; 3.27,-14.173 R20_cdh3.2@5.607,-14.173 ; Q2_cdh4.3@5.8,-4.68 3.975,-4.68 2.864,-5.791 2.864,-16.18 ; v1@28.445,-21.832 cw(c28.243,-22.403) 28.848,-22.403 ; v1@28.494,-22.048 ccw(c27.638,-21.193) 28.848,-21.193 ; v1@28.494,-21.863 cw(c27.638,-22.719) 28.848,-22.719 ; v1@28.58,-15.396 cw(c28.042,-15.997) 28.848,-15.997 ; v1@28.585,-15.401 cw(c27.95,-16.036) 28.848,-16.036 ; v1(28.726,-15.728) 28.848,-15.85 R20_cdh2.2@28.848,-16.84 v1(28.848,-21.971) R20_cdh5.2@28.848,-23.571 ; 28.823,-19.837 25.622,-19.837 24.555,-18.771 24.555,-6.35 23.463,-5.258 14.903,-5.258 13.608,-6.553 13.608,-14.986 12.414,-16.18 2.864,-16.18 ; v1@38.288,-15.757 cw(c37.776,-16.269) R20_cdh1.2@38.5,-16.269 ; v1@38.307,-15.501 ccw(c38.786,-15.629) v1@38.357,-15.877 ; v1(38.434,-15.535) 38.5,-15.601 R20_cdh1.2@38.5,-16.713 ; 43.666,-28.387 ccw(c43.666,-27.427) C2_cdh2.1@44.344,-28.106 ; C2_cdh2.1@44.704,-28.106 ccw(c45.382,-27.427) 45.382,-28.387 ; 46.843,-28.387 ccw(c46.843,-27.836) v1@47.233,-28.225 ; v1@47.048,-28.225 ccw(c47.437,-27.836) 47.437,-28.387 ; 54.765,-28.387 ccw(c54.765,-27.427) C2_cdh3.1@55.444,-28.106 ; C2_cdh3.1@55.803,-28.106 ccw(c56.482,-27.427) 56.482,-28.387 ; 57.943,-28.387 ccw(c57.943,-27.836) v1@58.333,-28.225 ; v1@58.147,-28.225 ccw(c58.537,-27.836) 58.537,-28.387 ; 65.611,-28.387 ccw(c65.611,-27.427) C2_cdh4.1@66.29,-28.106 ; C2_cdh4.1@66.649,-28.106 ccw(c67.328,-27.427) 67.328,-28.387 ; 68.789,-28.387 ccw(c68.789,-27.836) v1@69.178,-28.225 ; v1@68.993,-28.225 ccw(c69.383,-27.836) 69.383,-28.387 ; 76.482,-28.387 ccw(c76.482,-27.427) C2_cdh5.1@77.161,-28.106 ; C2_cdh5.1@77.52,-28.106 ccw(c78.199,-27.427) 78.199,-28.387 ; 79.66,-28.387 ccw(c79.66,-27.836) v1@80.05,-28.225 ; v1@79.864,-28.225 ccw(c80.254,-27.836) 80.254,-28.387 ; 87.303,-28.387 ccw(c87.303,-27.427) C2_cdh6.1@87.982,-28.106 ; C2_cdh6.1@88.341,-28.106 ccw(c89.02,-27.427) 89.02,-28.387 ; 90.48,-28.387 ccw(c90.48,-27.836) v1@90.87,-28.225 ; v1@90.685,-28.225 ccw(c91.074,-27.836) 91.074,-28.387 ; 98.377,-28.387 ccw(c98.377,-27.427) C2_cdh7.1@99.056,-28.106 ; C2_cdh7.1@99.415,-28.106 ccw(c100.094,-27.427) 100.094,-28.387 ; 101.555,-28.387 ccw(c101.555,-27.836) v1@101.944,-28.225 ; v1@101.759,-28.225 ccw(c102.149,-27.836) 102.149,-28.387 ; R20_cdh8.2@113.403,-16.765 ccw(c111.911,-14.798) v1(114.38,-14.798) ; R20_cdh8.2@113.43,-16.967 114.38,-16.017 v1(114.38,-14.798) ; R20_cdh8.2@113.811,-16.967 cw(c114.731,-16.967) 114.08,-16.317 ; R20_cdh8.2@113.864,-17.372 ccw(c113.076,-16.333) 114.38,-16.333 ; v1(115.081,-7.493) 114.38,-8.194 v1(114.38,-14.798) ; 117.097,-28.387 ccw(c117.097,-27.427) C2_cdh8.1@117.776,-28.106 ; C2_cdh8.1@118.135,-28.106 ccw(c118.814,-27.427) 118.814,-28.387 ; 120.275,-28.387 ccw(c120.275,-27.836) v1@120.664,-28.225 ; v1@120.479,-28.225 ccw(c120.869,-27.836) 120.869,-28.387 ; R20_cdh7.2@122.102,-4.519 ccw(c121.331,-4.062) v1(121.964,-3.429) 122.447,-3.912 R20_cdh7.2@122.447,-4.648 ; C5.1@128.619,-23.698 131.108,-23.698 ; C3.2@130.839,-9.617 cw(c130.189,-10.267) 131.108,-10.267 cw(c132.028,-10.267) C3.2@131.378,-9.617 ; C3.2@131.108,-9.347 131.108,-11.024 ; U1.2@138.254,-9.793 cw(c137.539,-10.509) 138.551,-10.509 cw(c139.562,-10.509) U1.2@138.847,-9.793 ; U1.2@138.551,-9.347 138.551,-11.151 137.89,-11.811 131.896,-11.811 131.108,-11.024 ; 2.864,-16.18 2.864,-26.492 4.758,-28.387 C2_cdh1.1@16.559,-28.387 130.296,-28.387 131.108,-27.574 131.108,-23.698 ; 131.108,-23.698 131.108,-11.024
  other v1: 2.889,-21.412 38.195,-15.85
H1_IN1_cdh1: U5_cdh1.1 U19_cdh1.6 | length 31.9
  Top Layer w0.254: U19_cdh1.6@15.404,-21.994 ccw(c15.237,-22.161) 15.237,-21.925 ccw(c15.237,-21.688) U19_cdh1.6@15.404,-21.856 ; U19_cdh1.6@16.023,-21.925 15.134,-21.925 14.577,-22.481 14.577,-29.56 15.751,-30.734 15.773,-30.734 16.027,-30.988 v1(34.917,-30.988) ; U5_cdh1.1@34.653,-31.252 ccw(c34.017,-31.888) 34.017,-30.988 ccw(c34.017,-30.088) U5_cdh1.1@34.653,-30.724 ; U5_cdh1.1@34.83,-31.075 ccw(c34.62,-31.285) 34.62,-30.988 ccw(c34.62,-30.691) U5_cdh1.1@34.83,-30.901
H1_IN1_cdh2: U5_cdh2.1 U19_cdh2.6 | length 14.5
  Top Layer w0.254: U19_cdh2.6@43.369,-21.892 ccw(c43.202,-22.06) 43.202,-21.823 ccw(c43.202,-21.587) U19_cdh2.6@43.369,-21.754 ; U19_cdh2.6@43.989,-21.823 42.839,-21.823 42.492,-22.17 42.492,-29.976 43.504,-30.988 v1(44.917,-30.988) ; U5_cdh2.1@44.653,-31.252 ccw(c44.017,-31.888) 44.017,-30.988 ccw(c44.017,-30.088) U5_cdh2.1@44.653,-30.724 ; U5_cdh2.1@44.83,-31.075 ccw(c44.62,-31.285) 44.62,-30.988 ccw(c44.62,-30.691) U5_cdh2.1@44.83,-30.901
H1_IN1_cdh3: U5_cdh3.1 U19_cdh3.6 | length 12.7
  Top Layer w0.254: U19_cdh3.6@54.469,-21.892 ccw(c54.302,-22.06) 54.302,-21.823 ccw(c54.302,-21.587) U19_cdh3.6@54.469,-21.754 ; U5_cdh3.1@54.593,-31.173 ccw(c54.273,-31.357) 54.273,-30.988 ; U5_cdh3.1@54.593,-30.803 cw(c54.273,-30.619) 54.273,-30.988 ; U19_cdh3.6@54.64,-21.823 53.913,-21.823 53.41,-22.327 53.41,-30.124 54.273,-30.988 ; U5_cdh3.1@54.83,-31.075 ccw(c54.62,-31.285) 54.62,-30.988 ccw(c54.62,-30.691) U5_cdh3.1@54.83,-30.901 ; v1(54.917,-30.988) 54.273,-30.988
H1_IN1_cdh4: U5_cdh4.1 U19_cdh4.6 | length 12.9
  Top Layer w0.254: U5_cdh4.1@64.585,-31.158 ccw(c64.306,-31.301) 64.306,-30.988 ; U5_cdh4.1@64.585,-30.818 cw(c64.306,-30.675) 64.306,-30.988 ; U5_cdh4.1@64.83,-31.075 ccw(c64.62,-31.285) 64.62,-30.988 ccw(c64.62,-30.691) U5_cdh4.1@64.83,-30.901 ; v1(64.917,-30.988) 64.306,-30.988 ; U19_cdh4.6@65.315,-21.892 ccw(c65.148,-22.06) 65.148,-21.823 ccw(c65.148,-21.587) U19_cdh4.6@65.315,-21.754 ; U19_cdh4.6@65.486,-21.823 64.397,-21.823 63.683,-22.537 63.683,-30.365 64.306,-30.988
H1_IN1_cdh5: U5_cdh5.1 U19_cdh5.6 | length 12.8
  Top Layer w0.254: U5_cdh5.1@74.653,-30.224 ccw(c74.017,-29.587) 74.917,-29.587 ccw(c75.817,-29.587) U5_cdh5.1@75.181,-30.224 ; U5_cdh5.1@74.83,-30.901 ccw(c74.62,-30.691) 74.917,-30.691 ccw(c75.214,-30.691) U5_cdh5.1@75.004,-30.901 ; v1(74.917,-30.988) 74.917,-22.721 75.814,-21.823 U19_cdh5.6@76.805,-21.823 ; U19_cdh5.6@76.186,-21.892 ccw(c76.019,-22.06) 76.019,-21.823 ccw(c76.019,-21.587) U19_cdh5.6@76.186,-21.754
H1_IN1_cdh6: U5_cdh6.1 U19_cdh6.6 | length 13.2
  Top Layer w0.254: U5_cdh6.1@84.653,-30.224 ccw(c84.016,-29.587) 84.917,-29.587 ccw(c85.817,-29.587) U5_cdh6.1@85.181,-30.224 ; U5_cdh6.1@84.83,-30.85 ccw(c84.62,-30.64) 84.917,-30.64 ccw(c85.214,-30.64) U5_cdh6.1@85.004,-30.85 ; U5_cdh6.1@84.917,-30.988 84.917,-28.335 85.801,-27.451 85.801,-22.504 86.482,-21.823 U19_cdh6.6@87.626,-21.823 ; U19_cdh6.6@87.007,-21.892 ccw(c86.839,-22.06) 86.839,-21.823 ccw(c86.839,-21.587) U19_cdh6.6@87.007,-21.754
  other v1: 84.917,-30.937
H1_IN1_cdh7: U5_cdh7.1 U19_cdh7.6 | length 14.2
  Top Layer w0.254: U5_cdh7.1@94.653,-30.224 ccw(c94.016,-29.587) 94.917,-29.587 ccw(c95.817,-29.587) U5_cdh7.1@95.181,-30.224 ; U5_cdh7.1@94.83,-30.901 ccw(c94.62,-30.691) 94.917,-30.691 ccw(c95.214,-30.691) U5_cdh7.1@95.004,-30.901 ; v1(94.917,-30.988) 94.917,-29.185 95.425,-28.677 96.317,-28.677 96.952,-28.042 96.952,-22.403 97.531,-21.823 U19_cdh7.6@98.7,-21.823 ; U19_cdh7.6@98.081,-21.892 ccw(c97.914,-22.06) 97.914,-21.823 ccw(c97.914,-21.587) U19_cdh7.6@98.081,-21.754
H1_IN1_cdh8: U5_cdh8.1 U19_cdh8.6 | length 21.6
  Top Layer w0.254: U5_cdh8.1@104.653,-30.224 ccw(c104.016,-29.587) 104.917,-29.587 ccw(c105.817,-29.587) U5_cdh8.1@105.181,-30.224 ; U5_cdh8.1@104.83,-30.901 ccw(c104.62,-30.691) 104.917,-30.691 ccw(c105.214,-30.691) U5_cdh8.1@105.004,-30.901 ; v1(104.917,-30.988) 104.917,-29.468 106.394,-27.991 114.116,-27.991 115.169,-26.938 115.169,-22.537 115.883,-21.823 U19_cdh8.6@116.972,-21.823 ; U19_cdh8.6@116.801,-21.892 ccw(c116.633,-22.06) 116.633,-21.823 ccw(c116.633,-21.587) U19_cdh8.6@116.801,-21.754
H1_IN3_cdh1: U5_cdh1.3 U19_cdh1.3 | length 37.4
  Top Layer w0.254: U19_cdh1.3@16.023,-19.975 18.332,-19.975 18.718,-20.36 18.718,-26.71 18.286,-27.142 18.286,-28.539 18.286,-29.163 18.993,-29.87 31.656,-29.87 32.824,-28.702 38.195,-28.702 38.917,-29.424 v1(38.917,-30.988) ; U19_cdh1.3@16.642,-20.044 cw(c16.81,-20.211) 16.81,-19.975 cw(c16.81,-19.738) U19_cdh1.3@16.642,-19.906 ; U5_cdh1.3@38.653,-30.224 ccw(c38.017,-29.587) 38.917,-29.587 ccw(c39.817,-29.587) U5_cdh1.3@39.181,-30.224 ; U5_cdh1.3@38.83,-30.901 ccw(c38.62,-30.691) 38.917,-30.691 ccw(c39.214,-30.691) U5_cdh1.3@39.004,-30.901
H1_IN3_cdh2: U5_cdh2.3 U19_cdh2.3 | length 17.7
  Top Layer w0.254: U19_cdh2.3@43.989,-19.873 46.297,-19.873 46.683,-20.259 46.683,-26.609 46.476,-26.816 46.476,-28.423 47.288,-29.235 48.635,-29.235 48.917,-29.518 v1(48.917,-30.988) ; U19_cdh2.3@44.608,-19.942 cw(c44.775,-20.11) 44.775,-19.873 cw(c44.775,-19.637) U19_cdh2.3@44.608,-19.804 ; U5_cdh2.3@48.653,-30.224 ccw(c48.017,-29.587) 48.917,-29.587 ccw(c49.817,-29.587) U5_cdh2.3@49.181,-30.224 ; U5_cdh2.3@48.83,-30.901 ccw(c48.62,-30.691) 48.917,-30.691 ccw(c49.214,-30.691) U5_cdh2.3@49.004,-30.901
H1_IN3_cdh3: U5_cdh3.3 U19_cdh3.3 | length 16.9
  Top Layer w0.254: U19_cdh3.3@55.088,-19.873 57.397,-19.873 57.783,-20.259 57.783,-26.609 57.351,-27.041 57.351,-29.011 57.677,-29.337 58.566,-29.337 58.917,-29.688 ; U19_cdh3.3@55.708,-19.942 cw(c55.875,-20.11) 55.875,-19.873 cw(c55.875,-19.637) U19_cdh3.3@55.708,-19.804 ; U5_cdh3.3@58.677,-30.202 ccw(c58.246,-29.688) 58.917,-29.688 ; U5_cdh3.3@58.83,-30.901 ccw(c58.62,-30.691) 58.917,-30.691 ccw(c59.214,-30.691) U5_cdh3.3@59.004,-30.901 ; v1(58.917,-30.988) 58.917,-29.688 ; U5_cdh3.3@59.157,-30.202 cw(c59.588,-29.688) 58.917,-29.688
H1_IN3_cdh4: U5_cdh4.3 U19_cdh4.3 | length 16.3
  Top Layer w0.254: U19_cdh4.3@65.934,-19.873 68.243,-19.873 68.629,-20.259 68.629,-26.609 68.197,-27.041 68.197,-28.438 68.197,-28.884 68.917,-29.604 ; U19_cdh4.3@66.553,-19.942 cw(c66.721,-20.11) 66.721,-19.873 cw(c66.721,-19.637) U19_cdh4.3@66.553,-19.804 ; U5_cdh4.3@68.657,-30.221 ccw(c68.057,-29.604) 68.917,-29.604 ; U5_cdh4.3@68.83,-30.901 ccw(c68.62,-30.691) 68.917,-30.691 ccw(c69.214,-30.691) U5_cdh4.3@69.004,-30.901 ; v1(68.917,-30.988) 68.917,-29.604 ; U5_cdh4.3@69.177,-30.221 cw(c69.777,-29.604) 68.917,-29.604
H1_IN3_cdh5: U5_cdh5.3 U19_cdh5.3 | length 16.9
  Top Layer w0.254: U19_cdh5.3@76.805,-19.873 79.114,-19.873 79.5,-20.259 79.5,-26.609 79.068,-27.041 79.068,-30.837 v1(78.917,-30.988) ; U19_cdh5.3@77.425,-19.942 cw(c77.592,-20.11) 77.592,-19.873 cw(c77.592,-19.637) U19_cdh5.3@77.425,-19.804 ; U5_cdh5.3@78.653,-30.224 ccw(c77.652,-29.223) 79.068,-29.223 ; U5_cdh5.3@78.83,-30.901 ccw(c78.256,-30.327) U5_cdh5.3@79.068,-30.327 ; U5_cdh5.3@78.833,-30.404 ccw(c78.265,-29.836) 79.068,-29.836 ; 79.068,-29.952 ccw(c79.453,-29.952) U5_cdh5.3@79.181,-30.224
H1_IN3_cdh6: U5_cdh6.3 U19_cdh6.3 | length 16.4
  Top Layer w0.254: U19_cdh6.3@87.626,-19.873 89.935,-19.873 90.32,-20.259 90.32,-26.609 89.888,-27.041 89.888,-28.438 88.917,-29.409 v1(88.917,-30.988) ; U19_cdh6.3@88.245,-19.942 cw(c88.412,-20.11) 88.412,-19.873 cw(c88.412,-19.637) U19_cdh6.3@88.245,-19.804 ; U5_cdh6.3@88.653,-30.224 ccw(c88.016,-29.587) 88.917,-29.587 ccw(c89.817,-29.587) U5_cdh6.3@89.181,-30.224 ; U5_cdh6.3@88.83,-30.901 ccw(c88.62,-30.691) 88.917,-30.691 ccw(c89.214,-30.691) U5_cdh6.3@89.004,-30.901
H1_IN3_cdh7: U5_cdh7.3 U19_cdh7.3 | length 17.3
  Top Layer w0.254: U5_cdh7.3@98.662,-30.216 ccw(c98.108,-29.626) 98.917,-29.626 ; U19_cdh7.3@98.7,-19.873 101.009,-19.873 101.395,-20.259 101.395,-26.609 100.963,-27.041 100.963,-28.438 100.449,-28.951 99.592,-28.951 98.917,-29.626 ; U5_cdh7.3@98.83,-30.901 ccw(c98.62,-30.691) 98.917,-30.691 ccw(c99.214,-30.691) U5_cdh7.3@99.004,-30.901 ; v1(98.917,-30.988) 98.917,-29.626 ; U5_cdh7.3@99.172,-30.216 cw(c99.726,-29.626) 98.917,-29.626 ; U19_cdh7.3@99.319,-19.942 cw(c99.487,-20.11) 99.487,-19.873 cw(c99.487,-19.637) U19_cdh7.3@99.319,-19.804
H1_IN3_cdh8: U5_cdh8.3 U19_cdh8.3 | length 25.9
  Top Layer w0.254: U5_cdh8.3@108.67,-30.209 ccw(c108.182,-29.659) 108.917,-29.659 ; U5_cdh8.3@108.83,-30.901 ccw(c108.62,-30.691) 108.917,-30.691 ccw(c109.214,-30.691) U5_cdh8.3@109.004,-30.901 ; v1(108.917,-30.988) 108.917,-29.659 ; U5_cdh8.3@109.164,-30.209 cw(c109.652,-29.659) 108.917,-29.659 ; U19_cdh8.3@117.42,-19.873 119.729,-19.873 120.114,-20.259 120.114,-26.609 119.683,-27.041 119.683,-28.438 118.885,-29.235 109.341,-29.235 108.917,-29.659 ; U19_cdh8.3@118.039,-19.942 cw(c118.207,-20.11) 118.207,-19.873 cw(c118.207,-19.637) U19_cdh8.3@118.039,-19.804
H1_OUT2_cdh1: R18_cdh1.1 U3_cdh1.4 U5_cdh1.2 U19_cdh1.7 | length 44.1
  Top Layer w0.254: 15.07,-28.118 U3_cdh1.4@16.485,-28.118 ; U19_cdh1.7@15.404,-22.644 ccw(c15.237,-22.811) 15.237,-22.575 ccw(c15.237,-22.338) U19_cdh1.7@15.404,-22.506 ; U19_cdh1.7@15.457,-22.672 ccw(c15.37,-23.21) 14.984,-22.824 ; U3_cdh1.4@15.663,-28.279 ccw(c15.273,-28.67) 15.273,-28.118 ccw(c15.273,-27.566) U3_cdh1.4@15.663,-27.956 ; U19_cdh1.7@16.642,-22.644 cw(c16.81,-22.811) 16.81,-22.575 cw(c16.81,-22.338) U19_cdh1.7@16.642,-22.506 ; 17.089,-22.575 ccw(c17.089,-22.262) v1@17.31,-22.483 ; 17.111,-22.575 cw(c17.111,-22.856) v1@17.31,-22.657 ; v1(17.397,-22.57) 17.392,-22.575 U19_cdh1.7@16.023,-22.575 15.233,-22.575 14.984,-22.824 ; U5_cdh1.2@36.653,-30.224 ccw(c36.016,-29.587) 36.917,-29.587 ccw(c37.817,-29.587) U5_cdh1.2@37.181,-30.224 ; U5_cdh1.2@36.83,-30.901 ccw(c36.62,-30.691) 36.917,-30.691 ccw(c37.214,-30.691) U5_cdh1.2@37.004,-30.901 ; v1(36.917,-30.988) 36.917,-29.507 36.57,-29.159 33.014,-29.159 31.845,-30.328 15.919,-30.328 14.984,-29.392 14.984,-28.412 14.984,-22.824
  Bottom Layer w0.254: R18_cdh1.1@15.845,-22.325 ccw(c16.437,-21.732) 16.437,-22.57 ; R18_cdh1.1@16.025,-22.864 cw(c16.733,-23.572) 16.733,-22.57 ; R18_cdh1.1@16.025,-22.145 ccw(c17.051,-21.119) 17.051,-22.57 ; R18_cdh1.1@16.12,-22.732 cw(c16.381,-22.862) 16.381,-22.57 ; R18_cdh1.1@16.161,-22.394 ccw(c16.381,-22.345) 16.381,-22.57 ; v1@17.31,-22.657 ccw(c17.1,-22.867) 17.1,-22.57 ccw(c17.1,-22.273) v1@17.31,-22.483 ; v1(17.397,-22.57) 16.381,-22.57